# Altium PCB yakimenko_power_control.PcbDoc (part 2 of 2)
Units mm, origin at the board's own origin, x right, y up, seen from the top; angles counter-clockwise.
Board outline 110 x 51 mm, 2 copper layers (Top Layer, Bottom Layer), stack 1.536 mm thick; 65 components, 40 nets, 213 pads, 270 vias.
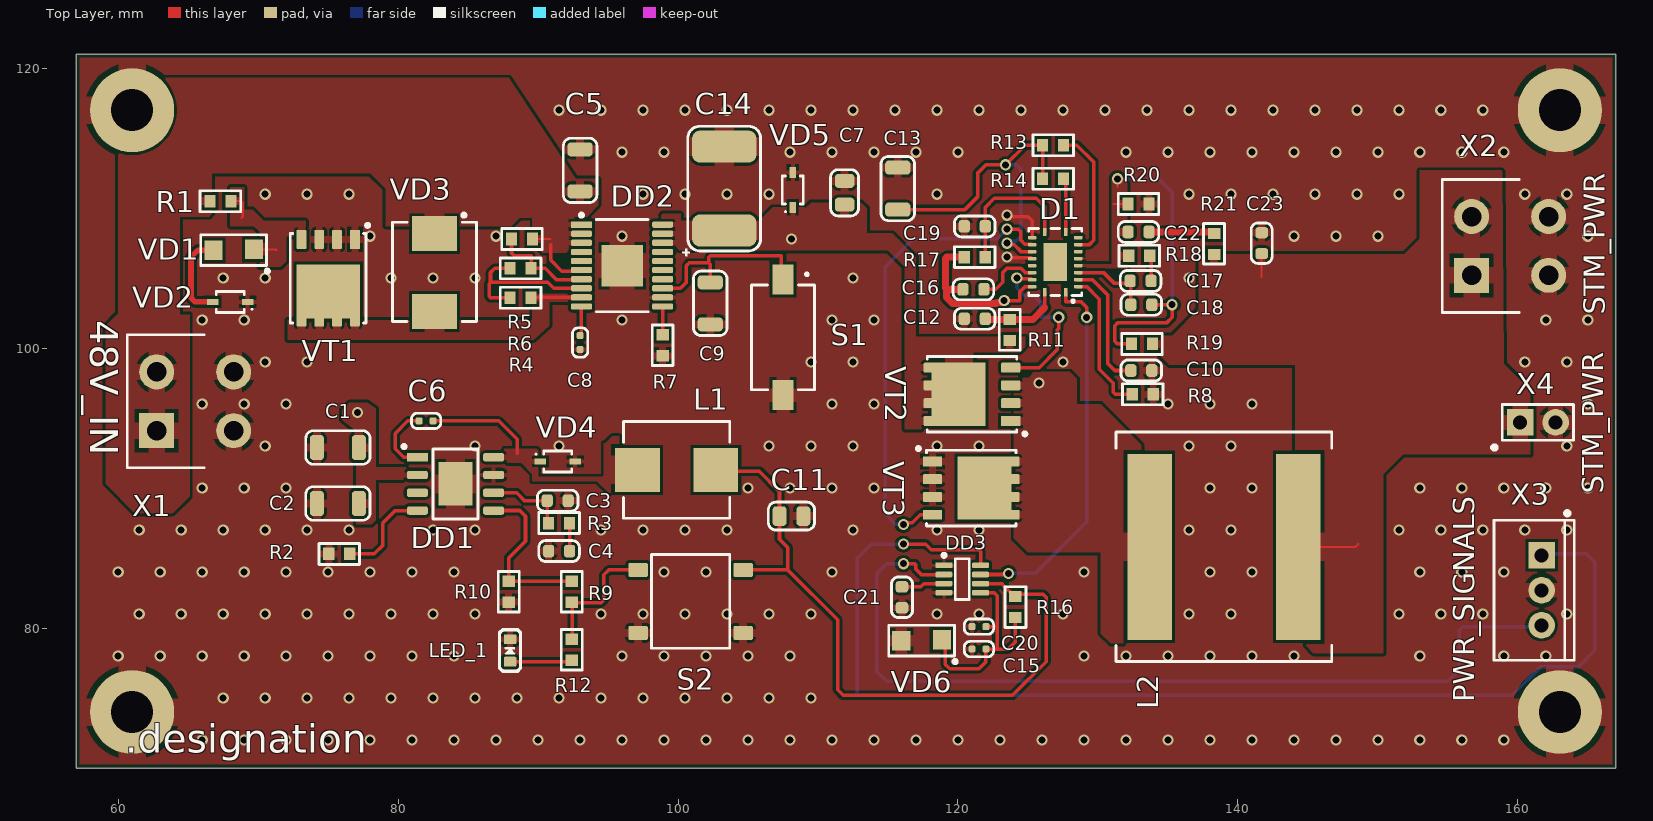
[diagram p0: Top Layer view]

## Via types
v1: diameter 0.8, hole 0.5, Top Layer to Bottom Layer, tented both sides, 252 vias
v2: diameter 0.8, hole 0.5, Top Layer to Bottom Layer, 18 vias

## Nets (pads, with @x,y where several pads share a name; then routed paths per layer and width w, separated by ;. In a path a pad name is that pad's centre, name@x,y a point inside that pad or via, vN(x,y) a via of type N, cw(c..) or ccw(c..) an arc to the next point about the centre after c; other vN are vias at no path point) (continued)
NetC3_1: (continued)
  Top Layer w0.254: DD1.6 88.465,89.665 89.03,89.1 C3.1 R3.2@90.65,87.6
NetC4_1: C4.1 R3.1 | length 2
  Top Layer w0.254: C4.1 R3.1
NetC8_1: C8.1 DD2.10 | length 2
  Top Layer w0.254: C8.1@93.1,101 DD2.10
NetC9_1: C9.1 DD2.13 S1.1 | length 13.6
  Top Layer w0.25: DD2.13 100.175,104.275 100.6,104.7 100.6,105.9 100.8,106.1 102.2,106.1 ; C9.1 102.3,106 102.2,106.1 ; S1.1 107.385,105.015 107.385,106.6 102.3,106.6 102.2,106.5 102.2,106.1
NetC10_1: C10.1 D1.3 | length 9.3
  Top Layer w0.254: D1.3 129.6,104.9 130.7,103.8 130.7,98.9 131.2,98.4 C10.1
NetC12_1: C12.1 D1.20 R11.1 | length 5.7
  Top Layer w0.15: C12.1 C12.1@122,102.05
  Top Layer w0.254: 126.2,102.9 D1.20
  Top Layer w0.5: C12.1@122,102.05 R11.1 125.35,102.05 126.2,102.9
NetC13_1: C13.1 D1.14 R13.1 R14.1 | length 24.9
  Top Layer w0.15: v2(123.5,107.5) v2@123.624,107.376
  Top Layer w0.25: v2(123.4,113.1) 124.8,114.5 R13.1 R14.1 ; v2@123.624,107.376 124.024,107.376 124.5,106.9 D1.14
  Top Layer w0.254: C13.1 120.5,109.9 121.4,110.8 121.4,112.5 122,113.1 v2(123.4,113.1)
  Bottom Layer w0.15: v2(123.5,107.5) v2@123.624,107.624
  Bottom Layer w0.25: v2(123.4,113.1) 124.2,113.1 124.5,112.8 124.5,108 124.124,107.624 v2@123.624,107.624
NetC15_1: C15.1 C20.1 DD3.5 R16.1 VD6.1 | length 15.9
  Top Layer w0.15: VD6.1 VD6.1@119.1,78.9
  Top Layer w0.25: VD6.1@119.1,78.9 119.1,77.4 119.4,77.1 121.5,77.1 122,77.6 C15.1
  Top Layer w0.254: DD3.5 122.575,82.525 122.8,82.3 122.8,80.1 ; C15.1 122.8,78.5 ; C20.1 122.8,80.1 ; R16.1 124.1,79 123.6,78.5 122.8,78.5 ; 122.8,78.5 122.8,80.1
NetC16_1: C16.1 D1.17 | length 4.6
  Top Layer w0.254: C16.1 122.7,104.2 123.2,104.7 123.2,105.4 123.5,105.7 124.5,105.7 124.8,105.4 D1.17
NetC17_1: C17.1 R18.1 | length 1.8
  Top Layer w0.15: R18.1 R18.1@133.8,106.5
  Top Layer w0.25: C17.1 R18.1@133.8,106.5
NetC17_2: C17.2 C18.2 D1.4 | length 5.7
  Top Layer w0.25: D1.4 130.4,105.4 131.147,104.653 132.253,104.653 132.35,104.75 C18.2
NetC19_1: C19.1 D1.11 R17.1 | length 10.1
  Top Layer w0.25: C19.1 121.95,110.05 122.6,110.7 125.6,110.7 126.2,110.1 D1.11
  Top Layer w0.254: R17.1 C19.1
NetC21_1: C21.1 DD3.3 | length 3.1
  Top Layer w0.254: C21.1 117.35,82.95 117.575,83.175 DD3.3
NetC22_1: C22.1 R21.1 | length 4.7
  Top Layer w0.15: R21.1@138.2,108.3 R21.1
  Top Layer w0.5: C22.1 R21.1@138.2,108.3
NetD1_2: D1.2 R8.2 | length 10.3
  Top Layer w0.254: D1.2 129.2,104.4 130.1,103.5 130.1,98.5 131.1,97.5 131.1,96.849 131.249,96.7 R8.2
NetD1_8: D1.8 R13.2 | length 9.5
  Top Layer w0.25: R13.2 128.5,114.5 129.7,113.3 129.7,107.7 129.4,107.4 D1.8
NetD1_10: D1.10 R14.2 | length 3.9
  Top Layer w0.15: R14.2 R14.2@127.7,111.95
  Top Layer w0.25: D1.10 R14.2@127.7,111.95
NetD1_13: D1.13 VT3.G | length 34.2
  Top Layer w0.15: v2(116.1,87.4) v2@116.224,87.524 ; VT3.G@118.175,88.1 VT3.G ; v2(123.5,108.5) v2@123.588,108.412 ; D1.13@125.275,107.425 D1.13
  Top Layer w0.25: v2@116.224,87.524 116.724,87.524 117.3,88.1 VT3.G@118.175,88.1 ; v2(123.5,108.5) 124.312,108.5 124.5,108.312 124.5,107.7 124.775,107.425 D1.13@125.275,107.425
  Bottom Layer w0.25: v2(116.1,87.4) 115.567,87.4 114.8,88.167 114.8,105.8 116.8,107.8 122.8,107.8 v2(123.5,108.5)
NetD1_18: D1.18 VT2.G | length 12.6
  Top Layer w0.15: v2(124.2,105) v2@124.25,104.95 ; D1.18@125.25,104.95 D1.18
  Top Layer w0.25: v2@124.25,104.95 D1.18@125.25,104.95
  Top Layer w0.254: VT2.G 125.805,98.605 127.1,99.9 127.1,101.3 127.2,101.4 v2(127.2,102.2)
  Bottom Layer w0.254: v2(124.2,105) 124.2,104.3 124.8,103.7 125.5,103.7 125.9,103.3 125.9,102.2 v2(127.2,102.2)
NetDD1_4: DD1.4 R2.2 | length 7
  Top Layer w0.254: R2.2 78.3,85.3 78.9,85.9 78.9,87.5 79.795,88.395 DD1.4
NetDD2_7: DD2.7 R4.1 R5.2 | length 7.3
  Top Layer w0.15: DD2.7@93.075,104.9 DD2.7
  Top Layer w0.25: R5.2 90.5,105.7 91.3,104.9 DD2.7@93.075,104.9
  Top Layer w0.254: R4.1 88.1,106.8 88.3,106.6 89.5,106.6 R5.2
NetDD2_8: DD2.8 R5.1 R6.2 | length 11.5
  Top Layer w0.254: R6.2 86.6,103.6 86.5,103.7 86.5,104.6 86.6,104.7 ; R5.1 86.9,105.7 86.6,105.4 86.6,104.7 ; DD2.8 91.125,104.275 90.7,104.7 87.9,104.7 86.6,104.7
NetDD2_9: DD2.9 R6.1 VD3.2 VT1.D | length 3.6
  Top Layer w0.15: R6.1 R6.1@89.525,103.625
  Top Layer w0.25: R6.1@89.525,103.625 DD2.9
NetDD2_11: DD2.11 R7.1 | length 2
  Top Layer w0.254: R7.1 DD2.11
"NetPWR OUT1_2": LED_1.2 R12.1 | length 4.4
  Top Layer w0.15: R12.1@92.3,77.6 R12.1
  Top Layer w0.25: LED_1.2 R12.1@92.3,77.6
NetR1_1: R1.1 VD1.1 VT1.G | length 3.7
  Top Layer w0.15: R1.1 68.812,110.5 68.9,110.412 68.9,109.4 68.8,109.3 ; VD1.1@69.75,107 VD1.1 71.25,107.05 71.3,107 ; VT1.G VT1.G@73.1,107.775
NetVD1_2: VD1.2 VD2.2 | length 6.4
  Top Layer w0.4: VD2.2 65.5,103.3 65.2,103.6 65.2,106.5 65.7,107 VD1.2
nINT: DD3.8 X3.1 | length 84.7
  Top Layer w0.25: v2(116.1,86) 117.7,86 118.1,85.6 121.5,85.6 121.61,85.49 DD3.8
  Bottom Layer w0.15: X3.1 X3.1@161.8,85.3
  Bottom Layer w0.25: v2(116.1,86) 113.8,86 112.8,85 112.8,75.2 159.604,75.2 161.654,77.25 164.346,77.25 165.5,78.404 165.5,84.7 164.9,85.3 X3.1@161.8,85.3
nKILL: DD3.2 X3.3 | length 63.7
  Top Layer w0.25: v2(116.1,84.6) 116.912,84.6 117,84.512 117,84.2 117.375,83.825 DD3.2
  Bottom Layer w0.15: X3.3@161.6,80.1 X3.3
  Bottom Layer w0.25: v2(116.1,84.6) 114.9,84.6 114.2,83.9 114.2,76.9 114.9,76.2 155,76.2 155.8,77 155.8,79.8 156.1,80.1 X3.3@161.6,80.1
SW_1: C16.2 D1.19 L2.1 R17.2 VT2.S VT3.D | length 12.5
  Top Layer w0.15: v2@123.176,103.276 v2(123.3,103.4)
  Top Layer w0.254: v2(123.3,103.4) 124.4,103.4 124.4,104 124.8,104.4 D1.19
  Top Layer w0.5: C16.2 119.188,104.2 ; R17.2 119.188,106.5 119.1,106.412 119.1,104.288 119.188,104.2 ; v2@123.176,103.276 122.776,103.276 122.7,103.2 119.6,103.2 119.188,103.612 119.188,104.2
  other v2: 125.8,97.5
SW_2: C6.1 DD1.8 L1.1 VD4.1 | length 7.5
  Top Layer w0.25: C6.1 87.2,94.8 88.5,93.5 88.5,92.5
pads on no net: D1.0 D1.7 D1.9 D1.16 DD1.3 DD2.4 DD2.5 DD2.14 DD2.15 DD2.16 DD2.17

## Polygon pours and split planes (outlines as drawn)
GND on Top Layer (solid, pour order 46): 57,121 57,70 167,70 167,121
FB_1 on Top Layer "Top Layer-FB_1" (solid, pour order 0): 128.6,105.9 128.8,105.7 132.1,105.7 132.1,112.1 131,112.1 131,106 128.7,106
NetR1_1 on Top Layer (solid, pour order 30): 68,111.5 68,108.7 69.7,108.7 70.1,108.3 70.1,105.8 71.6,105.8 72,106.2 72,108 73.4,108 73.4,109.1 70.4,109.1 69.6,109.9 69,109.9 69,111.5
SW_2 on Top Layer "Top Layer-SW_2" (solid, pour order 22): 87.3,92.8 89.9,92.8 90,92.7 90,90.8 94.6,90.8 94.7,90.9 94.7,93.2 94.8,93.2 95.3,93.7 95.8,93.7 95.8,89.3 95.3,89.3 95.3,89.4 94.2,90.5 89.6,90.5 89.6,91 88.8,91.8 87.3,91.8
48V_IN on Top Layer (solid, pour order 36): 64.4,102.4 64.4,109.4 66.5,109.4 66.7,109.6 66.7,112.5 78,112.5 79.1,111.4 79.1,108.7 88.1,108.7 88.7,109.3 89.6,109.3 89.6,107.5 90.3,106.8 92,106.8 92.7,107.5 92.6,107.6 92.6,109.4 93.5,109.4 94.3,110.2 94.3,112.1 92.7,112.1 87.9,119.3 60,119.3 60,102.5 59,101.5 59.1,101.4 59.1,90.3 61.2,88.2 63.9,88.2 65.1,89.4 65.1,102.4
24V_OUT on Top Layer (solid, pour order 38): 158.9,112.6 158.8,112.7 153,112.7 153,107.8 151.9,106.7 137.2,106.7 137.2,102.8 135.3,100.9 134,100.9 134,99.9 135.1,98.8 144.1,98.8 144.1,79.5 145.4,78.2 150.4,78.2 150.4,91 151.8,92.4 160.9,92.4 160.9,97 159,98.9
no net on Top Layer (solid, pour order 32): 63.8,102.1
NetC1_1 on Top Layer "Top Layer-NetC1_1 1" (solid, pour order 28): 77.8,96.1 76.5,96.1 76,95.6 76,94.9 76.15,94.75 77,94.1 77,87.4 78.1,87.4 78.4,87.7 78.4,90.6 81.1,90.6 81.1,91.5 78.4,91.5 78.4,95.7
no net on Top Layer "Top Layer-No Net" (solid, pour order 26): 77.1,94.4
NetDD2_9 on Top Layer "Top Layer-NetDD2_9" (solid, pour order 20): 72.1,102 89.6,102 89.6,103.5 89.5,103.6 89.8,103.9 92.6,103.9 92.6,103.5 92.4,103.3 90.8,103.3 90.8,101.6 89.7,100.6 89.6,100.6 72.1,100.6
SW_1 on Top Layer "Top Layer-SW_1 1" (solid, pour order 12): 127.2,98.3 125.4,98.3 125.1,97.9 124,97.9 124,86.4 125,85.4 130.2,85.4 130.2,79.6 130.9,78.9 133.1,78.9 133.1,93.1 130.2,96 128.5,96 128.5,97.8 128,98.3
NetC1_1 on Top Layer "Top Layer-NetC1_1" (solid, pour order 2): 98.8,109.6 98.9,109.5 98.9,107.525 99.575,107.525 100.1,107 115,107 116.2,105.8 116.2,94.2 117.635,94.2 121.1,97.665 121.1,99.7 124.4,99.7 124.8,100.1 124.8,100.8 117.1,100.8 117,100.9 117,106.5 115.3,108.2 113.5,108.2 113.5,110 113.1,110.4 109.5,110.4 109.1,110 109.05,110.05 106.75,110.05 105.1,108.4 100.5,108.4 100.2,108.7 100.2,109.6 98.8,109.6 98.9,109.5 98.9,107.525
GND on Bottom Layer (solid, pour order 52): 57,121 57,70 167,70 167,121
NetC1_1 on Bottom Layer (solid, pour order 50): 109,110.1 104.5,110.1 101.8,107.4 101.8,99.5 76.6,99.5 75.1,98 75.1,92.4 84,92.4 87.3,95.7 104.7,95.7 109,100
SW_1 on Bottom Layer "Bottom Layer-SW_1" (solid, pour order 16): 123,103.8 123.1,103.9 124,103.9 124.2,103.7 124.2,103 124.9,103 125.2,102.7 125.2,101.4 126.5,100.1 126.5,97 126.2,96.7 125.2,96.7 124.9,97 124.9,99.8 125.4,100.3 125.4,100.7 124.7,101.4 124.7,102.6 123.1,102.6 123,102.7
no net on Bottom Layer "Bottom Layer-No Net" (solid, pour order 8): 125.2,97.2 125.6,96.8

## Silkscreen, mask and mechanical layers (free items; w line width, h text height)
Top Overlay:
  text "STM_PWR" at 166.2,102.4 h1.5 r90
  text "48V_IN" at 58,102 h2 r270
  text "STM_PWR" at 166.1,89.6 h1.5 r90
  text "PWR_SIGNALS" at 156.9,74.7 h1.5 r90
  text ".designation" at 60.5,70.4 h3.5
Bottom Overlay:
  text ".pcb_dec_number" at 74.4,67.2 h2
Board:
  lines w0.1: 167,120.5 167,95.5 167,70 141.75,70 85.25,70 57,70 57,83.125 57,109.375 57,121 95,121 145,121 167,121
Assembly Notes (Mech5):
  text "'.title'" at 59.3,64.1 h2
  text "'.project'_'.pcb_dec_number'['.Pcb_File_Name_No_Path']" at 61.8,58.9 h2